# Altium PCB new.PcbDoc
Units mm, origin at the board's own origin, x right, y up, seen from the top; angles counter-clockwise.
Board outline 83.25 x 83.25 mm, 2 copper layers (Top Layer, Bottom Layer), stack 1.534 mm thick; 68 components, 65 nets, 208 pads, 0 vias.
Unrouted connection lines stored in the file: 143.
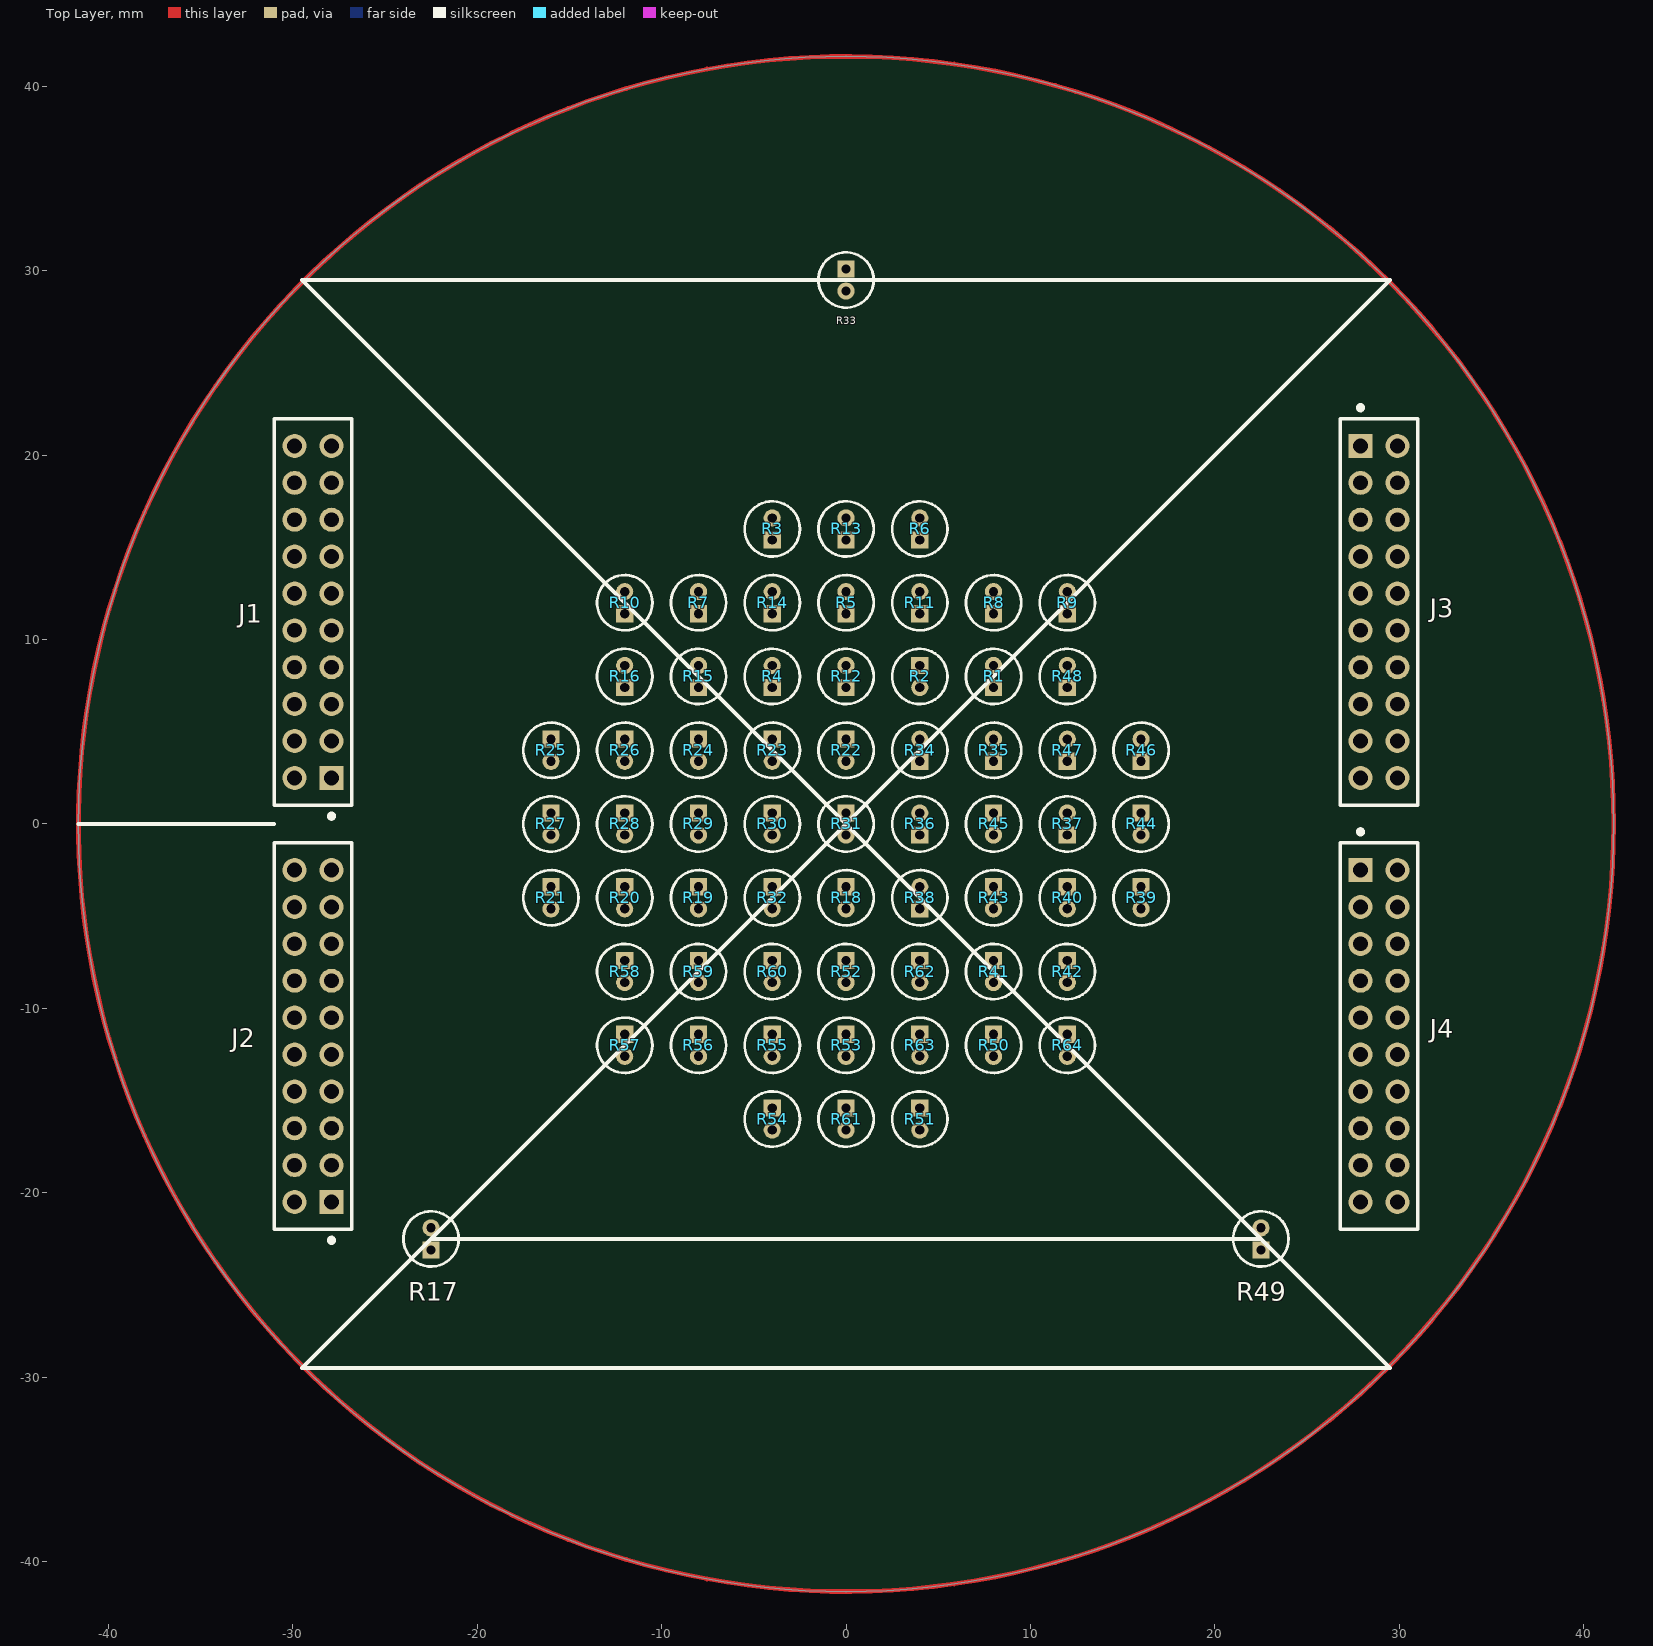
[diagram p0: Top Layer view]
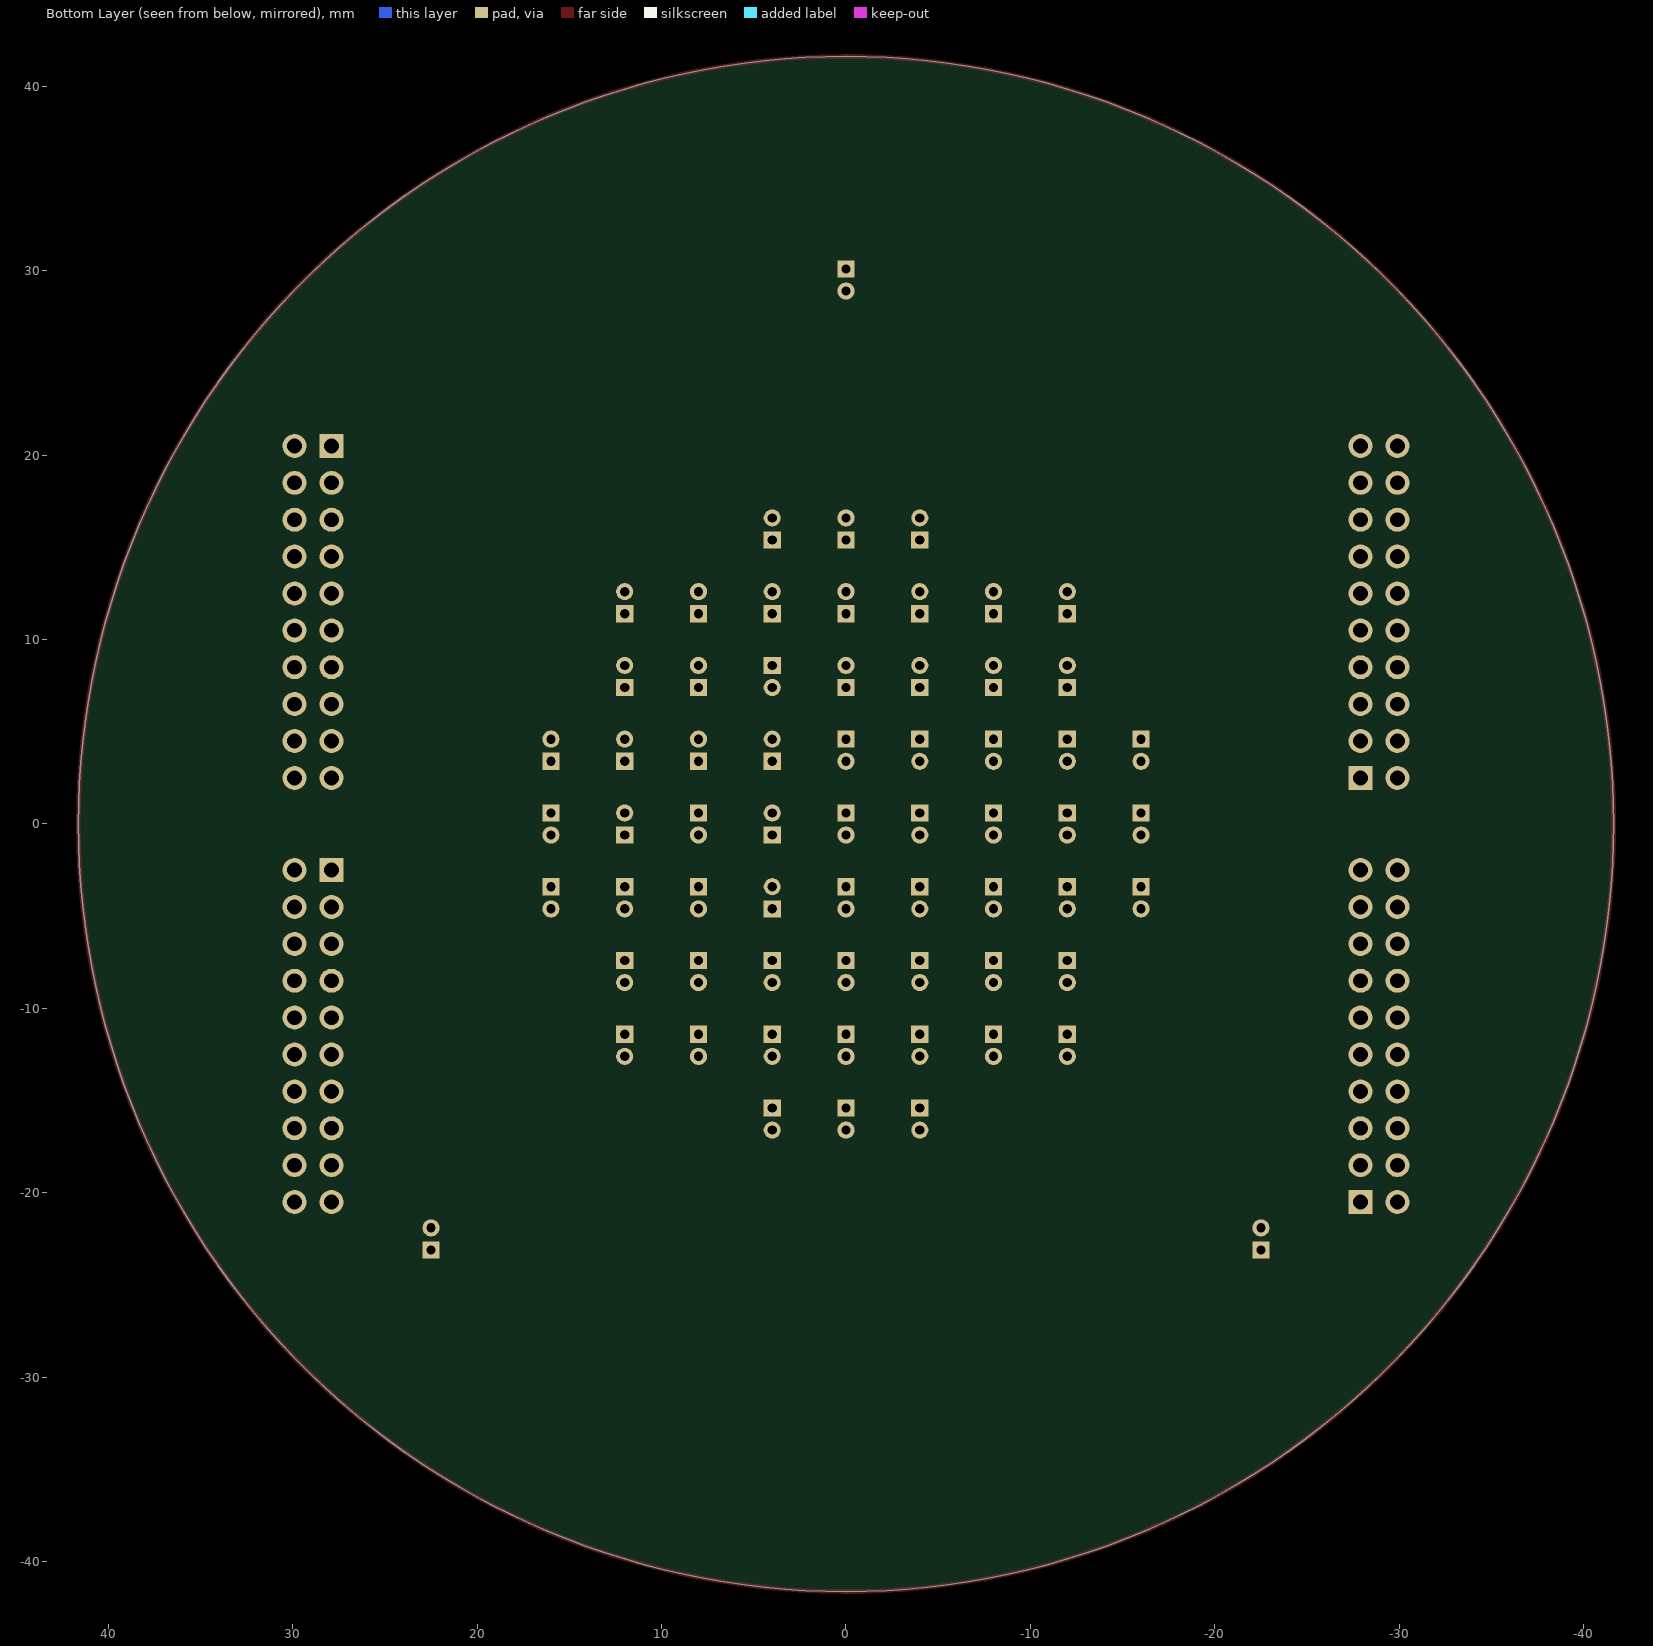
[diagram p1: Bottom Layer view, seen from below]

## Layer stack, top to bottom
Top Solder: solder mask 0.0254, SM-001, Dk 4
Top Layer: signal copper 0.0175
Dielectric 1: core 1.4986, Core-043, Dk 4.3
Bottom Layer: signal copper 0.0175
Bottom Solder: solder mask 0.0254, SM-001, Dk 4

## Board outline
-41.625,0 ccw(c0,0) 0,-41.625 ccw(c0,0) 41.625,0 ccw(c0,0) 0,41.625 ccw(c0,0)

## Design rules (kind name [scope] priority, off if disabled: settings)
BoardOutlineClearance [All] p1: gap=0.2 ignorepadtopadclearanceinfootprint=FALSE
Clearance [All] p1: gap=0.2 ignorepadtopadclearanceinfootprint=FALSE except(0.127: Arc-Arc Arc-Track Track-Track)
DiffPairsRouting [All] p1: maxlimit=0.254 minlimit=0.254 mostfreqgap=0.254 toplayer_minwidth=0.2 toplayer_maxwidth=0.5 toplayer_prefwidth=0.3 bottomlayer_minwidth=0.2 bottomlayer_maxwidth=0.5 bottomlayer_prefwidth=0.3 maxuncoupledlength=12.7
HoleSize [All] p1: absolutevalues=TRUE maxlimit=2.54 minlimit=0.2 maxpercent=80.000 minpercent=20.000
HoleToHoleClearance [All] p1: gap=0.5 allowstackedmicrovias=TRUE
MinimumAnnularRing [All] p1: minimumring=0.15
PolygonConnect [All] p1: connectstyle=Relief reliefconductorwidth=0.254 reliefentries=4 polygonreliefangle="90 Angle" airgapwidth=0.254
RoutingVias [All] p1: holewidth=0.3 width=0.7 viastyle="Through Hole" minholewidth=0.2 minwidth=0.5 maxholewidth=0.5 maxwidth=0.9
SolderMaskExpansion [All] p1: expansion=0.102 istentingtop=FALSE
UnRoutedNet [All] p1: checkbadconnections=TRUE
Width [All] p1: maxlimit=0.5 minlimit=0.2 preferedwidth=0.3
26 further rules are at their usual default settings.

## Components (designator, comment, footprint, x,y, rotation, side; value= is the part's Value field where it differs from the comment)
J1 "NPPN102AFCN-RC" "Header Connector 20 Pos 0.079\" (2.00mm) - A" -28.9,11.5 r90 top
J2 "NPPN102AFCN-RC" "Header Connector 20 Pos 0.079\" (2.00mm) - A" -28.9,-11.5 r90 top
J3 "NPPN102AFCN-RC" "Header Connector 20 Pos 0.079\" (2.00mm) - A" 28.9,11.5 r270 top
J4 "NPPN102AFCN-RC" "Header Connector 20 Pos 0.079\" (2.00mm) - A" 28.9,-11.5 r270 top
R1 "NTCLE413E2103F524A" "Thermistors NTC 10K 1% Bead - A" 8,8 r90 top value=10K
R2 "NTCLE413E2103F524A" "Thermistors NTC 10K 1% Bead - A" 4,8 r270 top
R3 "NTCLE413E2103F524A" "Thermistors NTC 10K 1% Bead - A" -4,16 r90 top value=10K
R4 "NTCLE413E2103F524A" "Thermistors NTC 10K 1% Bead - A" -4,8 r90 top value=10K
R5 "NTCLE413E2103F524A" "Thermistors NTC 10K 1% Bead - A" 0,12 r90 top value=10K
R6 "NTCLE413E2103F524A" "Thermistors NTC 10K 1% Bead - A" 4,16 r90 top value=10K
R7 "NTCLE413E2103F524A" "Thermistors NTC 10K 1% Bead - A" -8,12 r90 top value=10K
R8 "NTCLE413E2103F524A" "Thermistors NTC 10K 1% Bead - A" 8,12 r90 top value=10K
R9 "NTCLE413E2103F524A" "Thermistors NTC 10K 1% Bead - A" 12,12 r90 top value=10K
R10 "NTCLE413E2103F524A" "Thermistors NTC 10K 1% Bead - A" -12,12 r90 top value=10K
R11 "NTCLE413E2103F524A" "Thermistors NTC 10K 1% Bead - A" 4,12 r90 top value=10K
R12 "NTCLE413E2103F524A" "Thermistors NTC 10K 1% Bead - A" 0,8 r90 top value=10K
R13 "NTCLE413E2103F524A" "Thermistors NTC 10K 1% Bead - A" 0,16 r90 top value=10K
R14 "NTCLE413E2103F524A" "Thermistors NTC 10K 1% Bead - A" -4,12 r90 top value=10K
R15 "NTCLE413E2103F524A" "Thermistors NTC 10K 1% Bead - A" -8,8 r90 top
R16 "NTCLE413E2103F524A" "Thermistors NTC 10K 1% Bead - A" -12,8 r90 top value=10K
R17 "NTCLE413E2103F524A" "Thermistors NTC 10K 1% Bead - A" -22.5,-22.5 r90 top value=10K
R18 "NTCLE413E2103F524A" "Thermistors NTC 10K 1% Bead - A" 0,-4 r270 top
R19 "NTCLE413E2103F524A" "Thermistors NTC 10K 1% Bead - A" -8,-4 r270 top value=10K
R20 "NTCLE413E2103F524A" "Thermistors NTC 10K 1% Bead - A" -12,-4 r270 top value=10K
R21 "NTCLE413E2103F524A" "Thermistors NTC 10K 1% Bead - A" -16,-4 r270 top value=10K
R22 "NTCLE413E2103F524A" "Thermistors NTC 10K 1% Bead - A" 0,4 r270 top value=10K
R23 "NTCLE413E2103F524A" "Thermistors NTC 10K 1% Bead - A" -4,4 r270 top value=10K
R24 "NTCLE413E2103F524A" "Thermistors NTC 10K 1% Bead - A" -8,4 r270 top value=10K
R25 "NTCLE413E2103F524A" "Thermistors NTC 10K 1% Bead - A" -16,4 r270 top value=10K
R26 "NTCLE413E2103F524A" "Thermistors NTC 10K 1% Bead - A" -12,4 r270 top value=10K
R27 "NTCLE413E2103F524A" "Thermistors NTC 10K 1% Bead - A" -16,0 r270 top value=10K
R28 "NTCLE413E2103F524A" "Thermistors NTC 10K 1% Bead - A" -12,0 r270 top value=10K
R29 "NTCLE413E2103F524A" "Thermistors NTC 10K 1% Bead - A" -8,0 r270 top value=10K
R30 "NTCLE413E2103F524A" "Thermistors NTC 10K 1% Bead - A" -4,0 r270 top value=10K
R31 "NTCLE413E2103F524A" "Thermistors NTC 10K 1% Bead - A" 0,0 r270 top
R32 "NTCLE413E2103F524A" "Thermistors NTC 10K 1% Bead - A" -4,-4 r270 top value=10K
R33 "NTCLE413E2103F524A" "Thermistors NTC 10K 1% Bead - A" 0,29.5 r270 top value=10K
R34 "NTCLE413E2103F524A" "Thermistors NTC 10K 1% Bead - A" 4,4 r90 top
R35 "NTCLE413E2103F524A" "Thermistors NTC 10K 1% Bead - A" 8,4 r90 top value=10K
R36 "NTCLE413E2103F524A" "Thermistors NTC 10K 1% Bead - A" 4,0 r90 top value=10K
R37 "NTCLE413E2103F524A" "Thermistors NTC 10K 1% Bead - A" 12,0 r90 top value=10K
R38 "NTCLE413E2103F524A" "Thermistors NTC 10K 1% Bead - A" 4,-4 r90 top value=10K
R39 "NTCLE413E2103F524A" "Thermistors NTC 10K 1% Bead - A" 16,-4 r270 top value=10K
R40 "NTCLE413E2103F524A" "Thermistors NTC 10K 1% Bead - A" 12,-4 r270 top value=10K
R41 "NTCLE413E2103F524A" "Thermistors NTC 10K 1% Bead - A" 8,-8 r270 top value=10K
R42 "NTCLE413E2103F524A" "Thermistors NTC 10K 1% Bead - A" 12,-8 r270 top value=10K
R43 "NTCLE413E2103F524A" "Thermistors NTC 10K 1% Bead - A" 8,-4 r270 top value=10K
R44 "NTCLE413E2103F524A" "Thermistors NTC 10K 1% Bead - A" 16,0 r270 top value=10K
R45 "NTCLE413E2103F524A" "Thermistors NTC 10K 1% Bead - A" 8,0 r270 top value=10K
R46 "NTCLE413E2103F524A" "Thermistors NTC 10K 1% Bead - A" 16,4 r90 top value=10K
R47 "NTCLE413E2103F524A" "Thermistors NTC 10K 1% Bead - A" 12,4 r90 top
R48 "NTCLE413E2103F524A" "Thermistors NTC 10K 1% Bead - A" 12,8 r90 top value=10K
R49 "NTCLE413E2103F524A" "Thermistors NTC 10K 1% Bead - A" 22.5,-22.5 r90 top value=10K
R50 "NTCLE413E2103F524A" "Thermistors NTC 10K 1% Bead - A" 8,-12 r270 top
R51 "NTCLE413E2103F524A" "Thermistors NTC 10K 1% Bead - A" 4,-16 r270 top value=10K
R52 "NTCLE413E2103F524A" "Thermistors NTC 10K 1% Bead - A" 0,-8 r270 top value=10K
R53 "NTCLE413E2103F524A" "Thermistors NTC 10K 1% Bead - A" 0,-12 r270 top value=10K
R54 "NTCLE413E2103F524A" "Thermistors NTC 10K 1% Bead - A" -4,-16 r270 top value=10K
R55 "NTCLE413E2103F524A" "Thermistors NTC 10K 1% Bead - A" -4,-12 r270 top value=10K
R56 "NTCLE413E2103F524A" "Thermistors NTC 10K 1% Bead - A" -8,-12 r270 top value=10K
R57 "NTCLE413E2103F524A" "Thermistors NTC 10K 1% Bead - A" -12,-12 r270 top value=10K
R58 "NTCLE413E2103F524A" "Thermistors NTC 10K 1% Bead - A" -12,-8 r270 top value=10K
R59 "NTCLE413E2103F524A" "Thermistors NTC 10K 1% Bead - A" -8,-8 r270 top value=10K
R60 "NTCLE413E2103F524A" "Thermistors NTC 10K 1% Bead - A" -4,-8 r270 top value=10K
R61 "NTCLE413E2103F524A" "Thermistors NTC 10K 1% Bead - A" 0,-16 r270 top value=10K
R62 "NTCLE413E2103F524A" "Thermistors NTC 10K 1% Bead - A" 4,-8 r270 top value=10K
R63 "NTCLE413E2103F524A" "Thermistors NTC 10K 1% Bead - A" 4,-12 r270 top
R64 "NTCLE413E2103F524A" "Thermistors NTC 10K 1% Bead - A" 12,-12 r270 top value=10K

## Footprints (in the part's own frame and the unit in brackets; to place one, negate y for a bottom-side part, rotate by r counter-clockwise, add the part's x,y. Pads: shape width x height; smd on the part's side, far side on the other; paste and mask are expansions set on the pad)
"Header Connector 20 Pos 0.079\" (2.00mm) - A" [mm] "20 Position Header Connector 0.079\" (2.00mm) Through Hole Gold"
  rect 1.3x1.3 hole 0.8 paste-1000 mask+0: 1(-9,-1)
  round 1.3 hole 0.8 paste-1000 mask+0: 2(-7,-1) 3(-5,-1) 4(-3,-1) 5(-1,-1) 6(1,-1) 7(3,-1) 8(5,-1) 9(7,-1) 10(9,-1) 11(9,1) 12(7,1) 13(5,1) 14(3,1) 15(1,1) 16(-1,1) 17(-3,1) 18(-5,1) 19(-7,1) 20(-9,1)
  silkscreen extent -11.2,-2.1 10.48,2.1, body extent -10.58,-2.2 10.58,2.2, height 0.25
"Thermistors NTC 10K 1% Bead - A" [mm] "NTC Thermistor 10k Bead, Epoxy"
  rect 0.93x0.93 hole 0.5 paste-1000 mask+0: 1(-0.6,0)
  round 0.93 hole 0.5 paste-1000 mask+0: 2(0.6,0)
  silkscreen extent -1.5,-1.5 1.5,1.5, body extent -1.48,-1.5 1.48,1.5, height 1

## Part data
J1 J2 J3 J4: library part "Header Connector 20 Pos 0.079\" (2.00mm)", "20 Position Header Connector 0.079\" (2.00mm) Through Hole Gold", Supplier Part Number 1=S5750-10-ND, Supplier 1=Digi-Key
R1 R2 R3 R4 R5 R6 R7 R8 R9 R10 R11 R12 R13 R14 R15 R16 R17 R18 R19 R20 R21 R22 R23 R24 R25 R26 R27 R28 R29 R30 R31 R32 R33 R34 R35 R36 R37 R38 R39 R40 R41 R42 R43 R44 R45 R46 R47 R48 R49 R50 R51 R52 R53 R54 R55 R56 R57 R58 R59 R60 R61 R62 R63 R64: library part "Thermistors NTC 10K 1% Bead", "NTC Thermistor 10k Bead, Epoxy", Supplier Part Number 1=56-NTCLE413E2103F524A-ND, ComponentLink1Description=Datasheet, ComponentLink1URL=https://www.vishay.com/docs/29078/ntcle413.pdf, Supplier 1=Digi-Key

## Nets (pads, with @x,y where several pads share a name; then routed paths per layer and width w, separated by ;. In a path a pad name is that pad's centre, name@x,y a point inside that pad or via, vN(x,y) a via of type N, cw(c..) or ccw(c..) an arc to the next point about the centre after c; other vN are vias at no path point)
A1: J1.2 R1.2
A2: J1.3 R2.2
A3: J1.4 R3.2
A4: J1.5 R4.2
A5: J1.6 R5.2
A6: J1.7 R6.2
A7: J1.8 R7.2
A8: J1.9 R8.2
A10: J1.11 R9.2
A11: J1.12 R10.2
A12: J1.13 R11.2
A13: J1.14 R12.2
A14: J1.15 R13.2
A15: J1.16 R14.2
A16: J1.17 R15.2
A17: J1.18 R16.2
B1: J2.2 R17.2
B2: J2.3 R18.2
B3: J2.4 R19.2
B4: J2.5 R20.2
B5: J2.6 R21.2
B6: J2.7 R22.2
B7: J2.8 R23.2
B8: J2.9 R24.2
B10: J2.11 R25.2
B11: J2.12 R26.2
B12: J2.13 R27.2
B13: J2.14 R28.2
B14: J2.15 R29.2
B15: J2.16 R30.2
B16: J2.17 R31.2
B17: J2.18 R32.2
C1: J3.2 R33.2
C2: J3.3 R34.2
C3: J3.4 R35.2
C4: J3.5 R36.2
C5: J3.6 R37.2
C6: J3.7 R38.2
C7: J3.8 R39.2
C8: J3.9 R40.2
C10: J3.11 R41.2
C11: J3.12 R42.2
C12: J3.13 R43.2
C13: J3.14 R44.2
C14: J3.15 R45.2
C15: J3.16 R46.2
C16: J3.17 R47.2
C17: J3.18 R48.2
D1: J4.2 R49.2
D2: J4.3 R50.2
D3: J4.4 R51.2
D4: J4.5 R52.2
D5: J4.6 R53.2
D6: J4.7 R54.2
D7: J4.8 R55.2
D8: J4.9 R56.2
D10: J4.11 R57.2
D11: J4.12 R58.2
D12: J4.13 R59.2
D13: J4.14 R60.2
D14: J4.15 R61.2
D15: J4.16 R62.2
D16: J4.17 R63.2
D17: J4.18 R64.2
GND: J1.1 J1.10 J1.19 J1.20 J2.1 J2.10 J2.19 J2.20 J3.1 J3.10 J3.19 J3.20 J4.1 J4.10 J4.19 J4.20 R1.1 R2.1 R3.1 R4.1 R5.1 R6.1 R7.1 R8.1 R9.1 R10.1 R11.1 R12.1 R13.1 R14.1 R15.1 R16.1 R17.1 R18.1 R19.1 R20.1 R21.1 R22.1 R23.1 R24.1 R25.1 R26.1 R27.1 R28.1 R29.1 R30.1 R31.1 R32.1 R33.1 R34.1 R35.1 R36.1 R37.1 R38.1 R39.1 R40.1 R41.1 R42.1 R43.1 R44.1 R45.1 R46.1 R47.1 R48.1 R49.1 R50.1 R51.1 R52.1 R53.1 R54.1 R55.1 R56.1 R57.1 R58.1 R59.1 R60.1 R61.1 R62.1 R63.1 R64.1
copper on no net: | length 261.5
  Top Layer w0.254: 41.625,0 ccw(c0,0) 41.625,0

## Silkscreen, mask and mechanical layers (free items; w line width, h text height)
Top Overlay:
  lines w0.2: -41.625,0 -31,0 ; -22.5,-22.5 22.5,-22.5 ; 0,0 -29.5,29.5 29.5,29.5 0,0 ; 0,0 -29.5,-29.5 29.5,-29.5 0,0
Top Component Outline:
  lines w0.254: -49.9,0 0,0 ; 0,-49.9 0,0 ; 0,49.9 0,0 ; 49.9,0 0,0